# Altium PCB top-board.PcbDoc
Units mil, origin at the board's own origin, x right, y up, seen from the top; angles counter-clockwise.
Board outline 6000 x 6000 mil, 2 copper layers (Top Layer, Bottom Layer); 53 components, 50 nets, 178 pads, 0 vias.
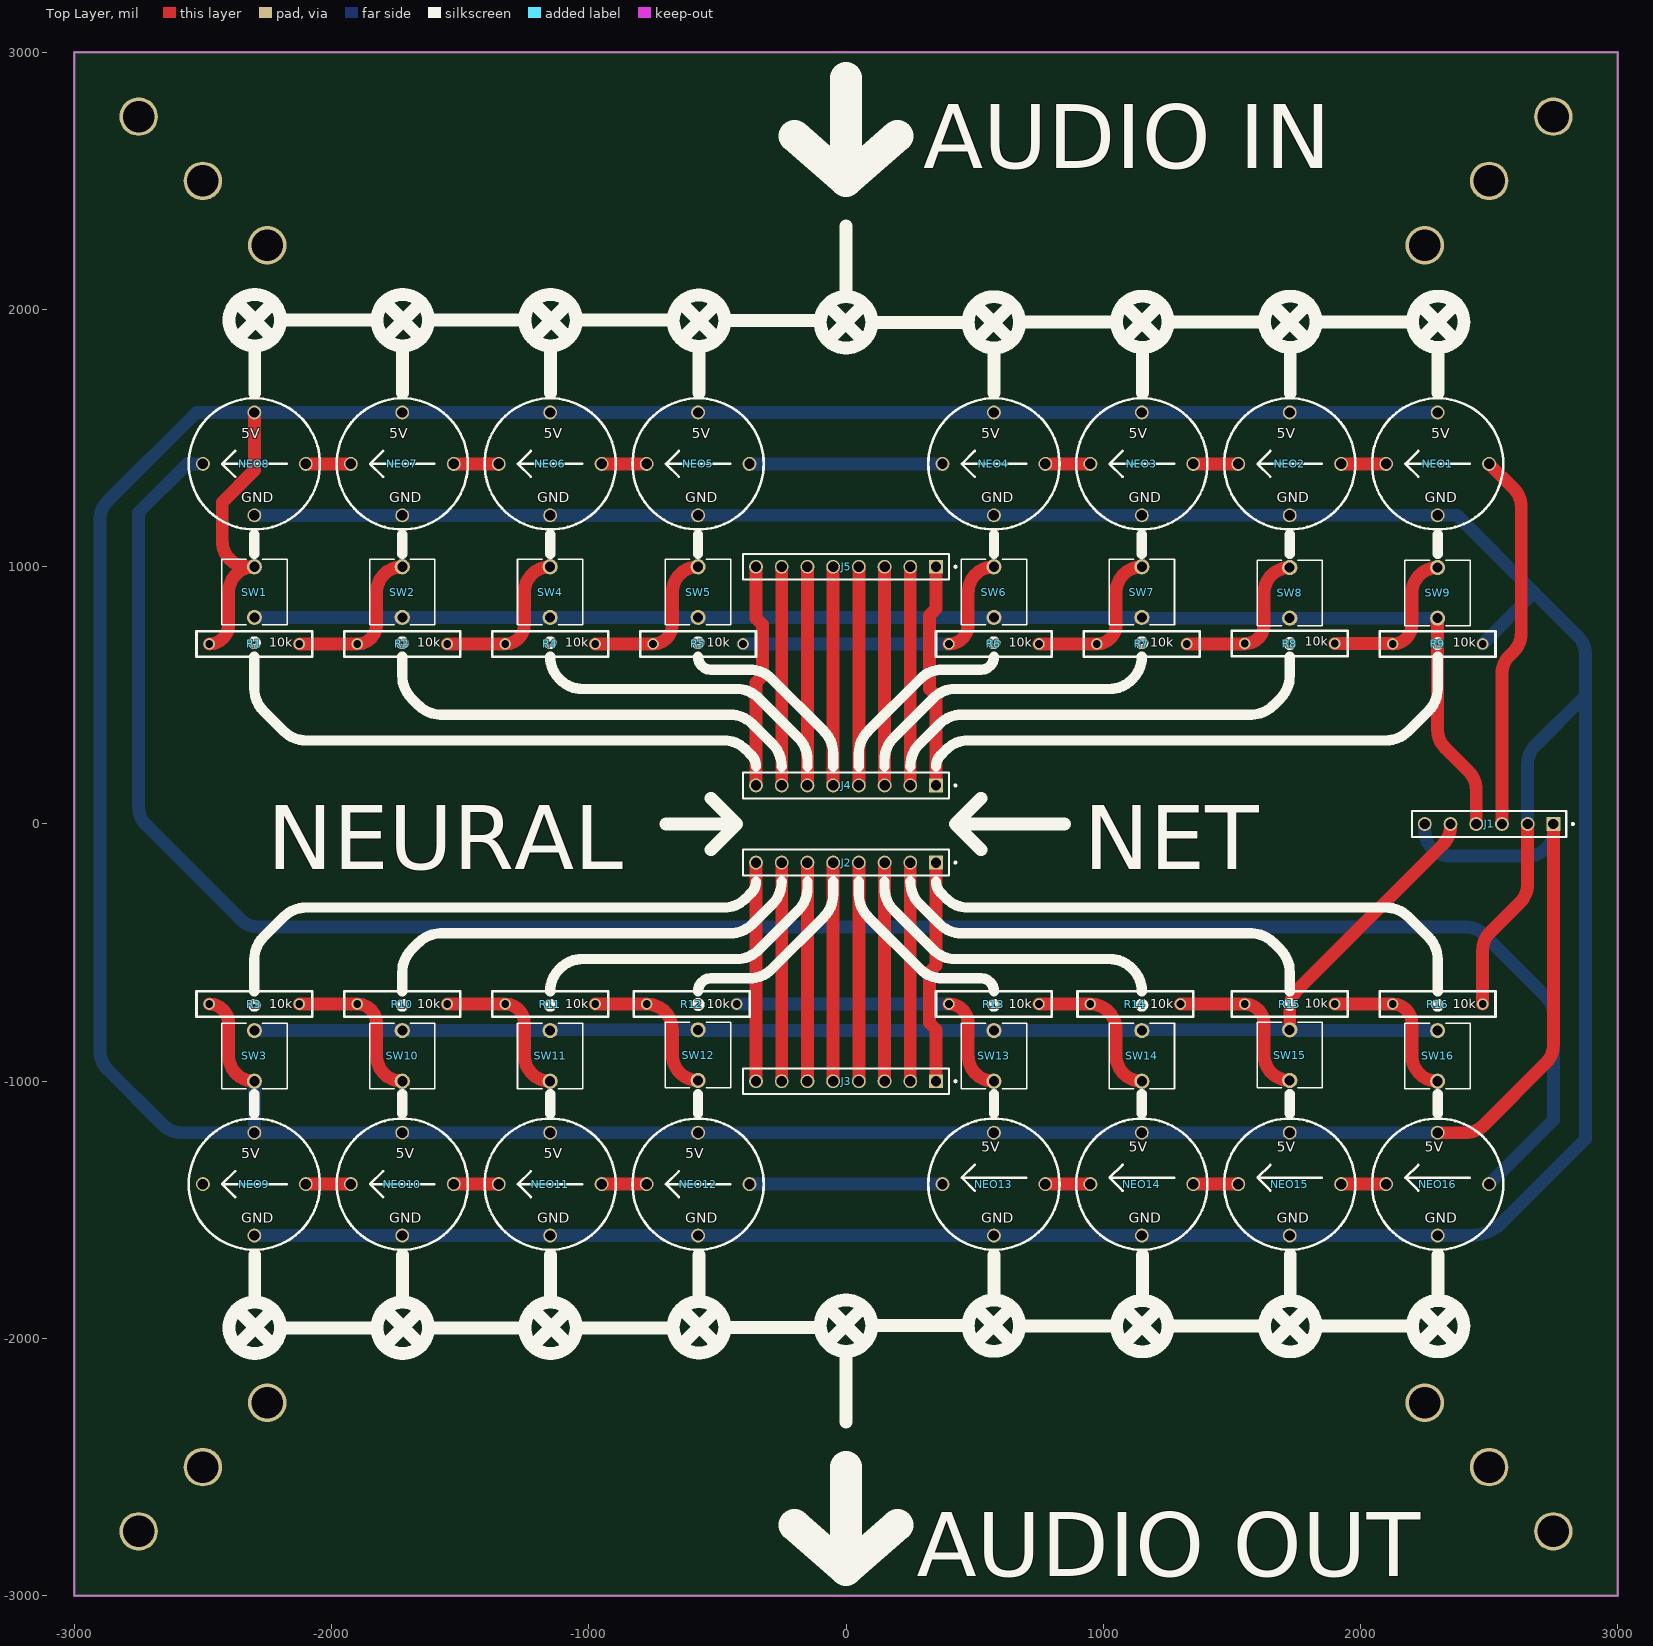
[diagram p0: Top Layer view]
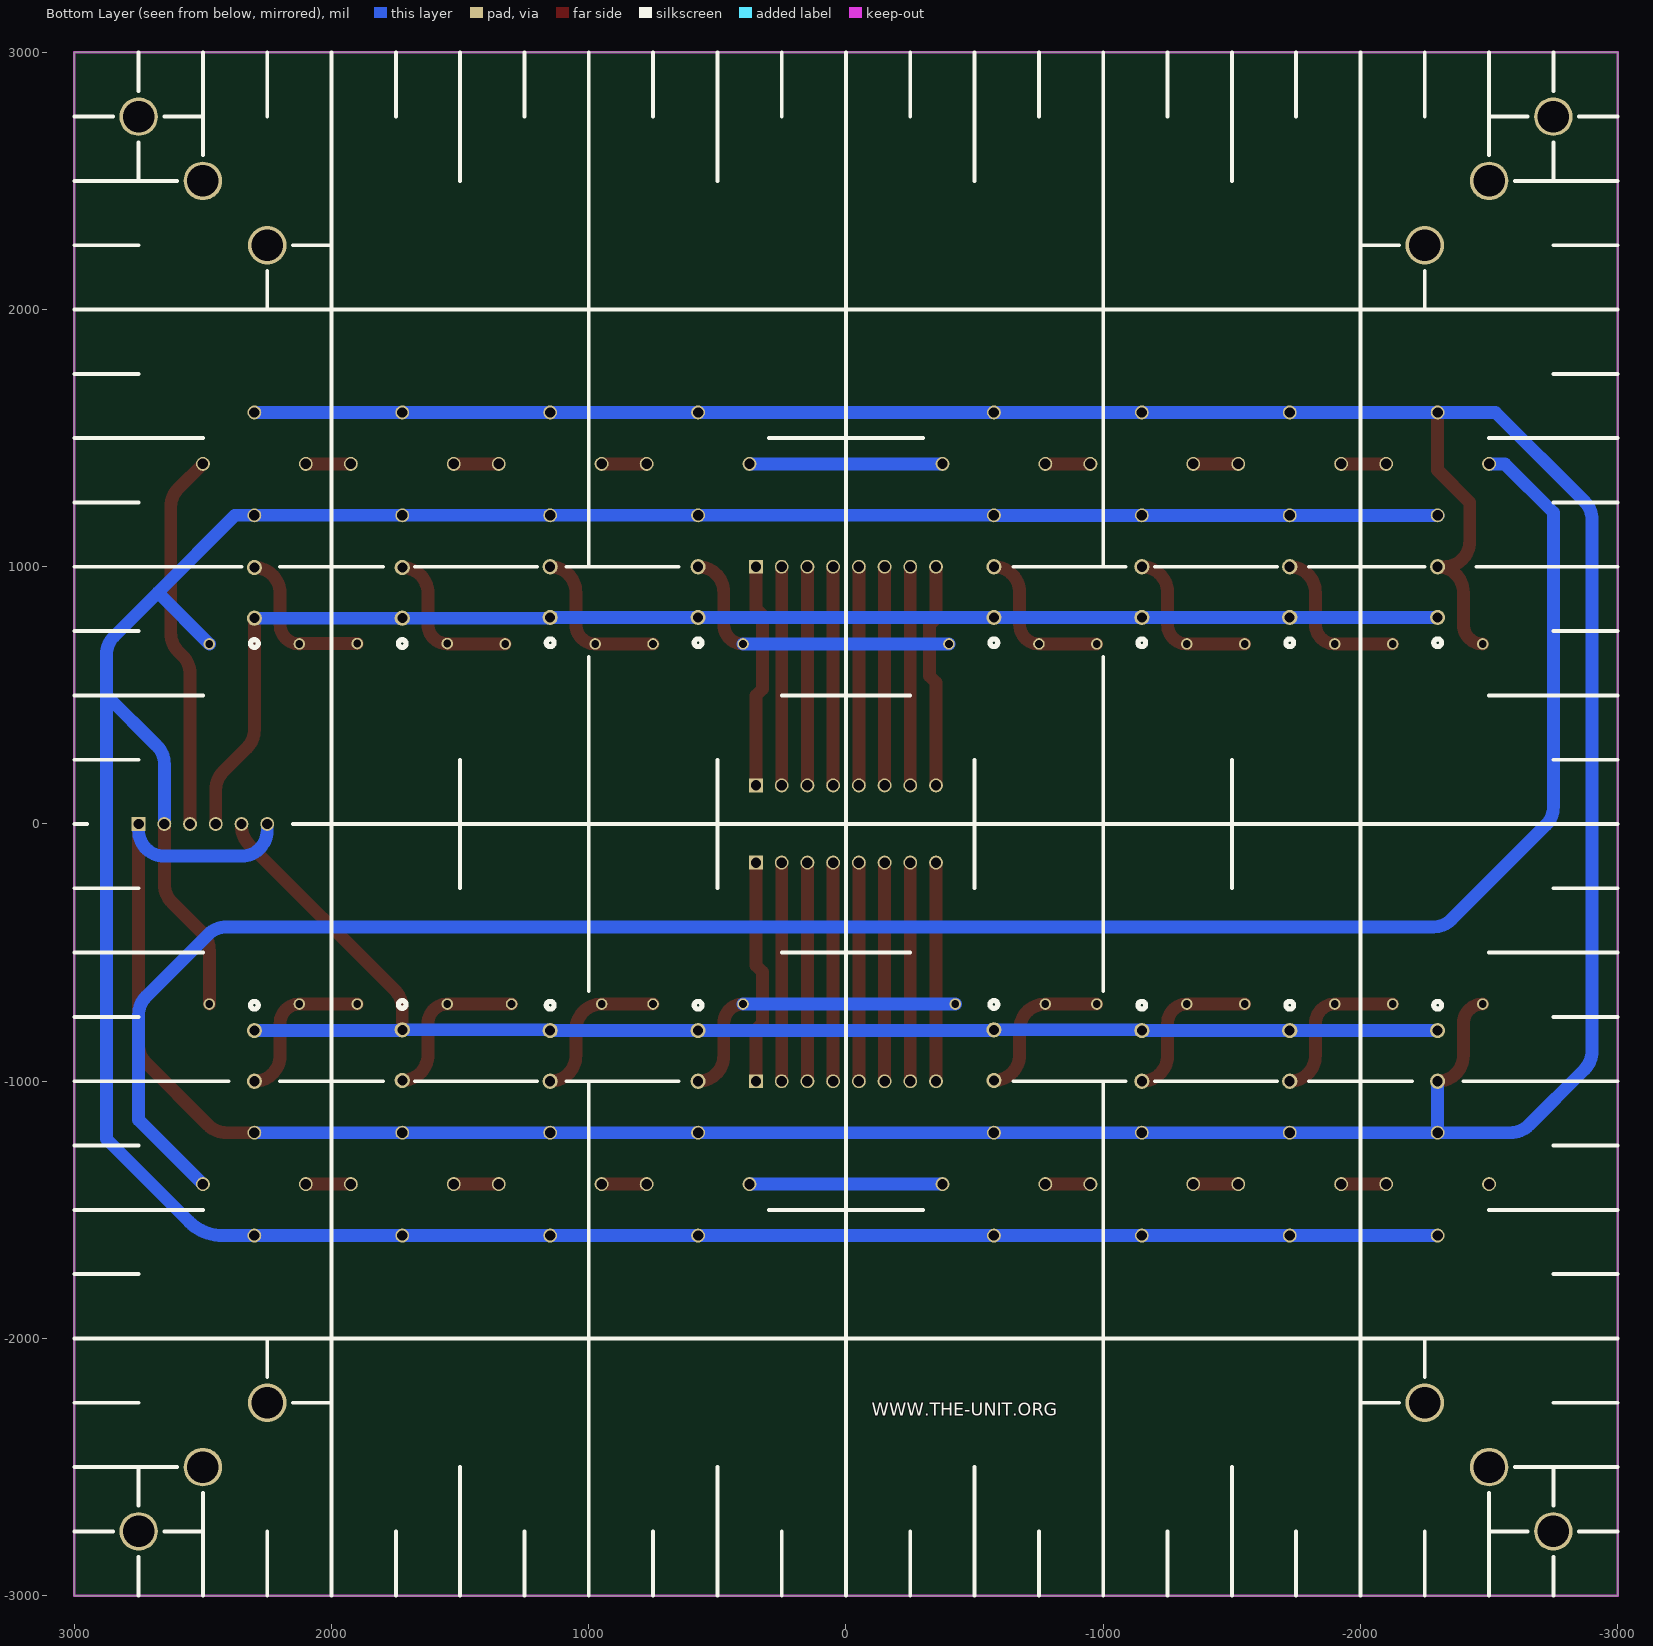
[diagram p1: Bottom Layer view, seen from below]
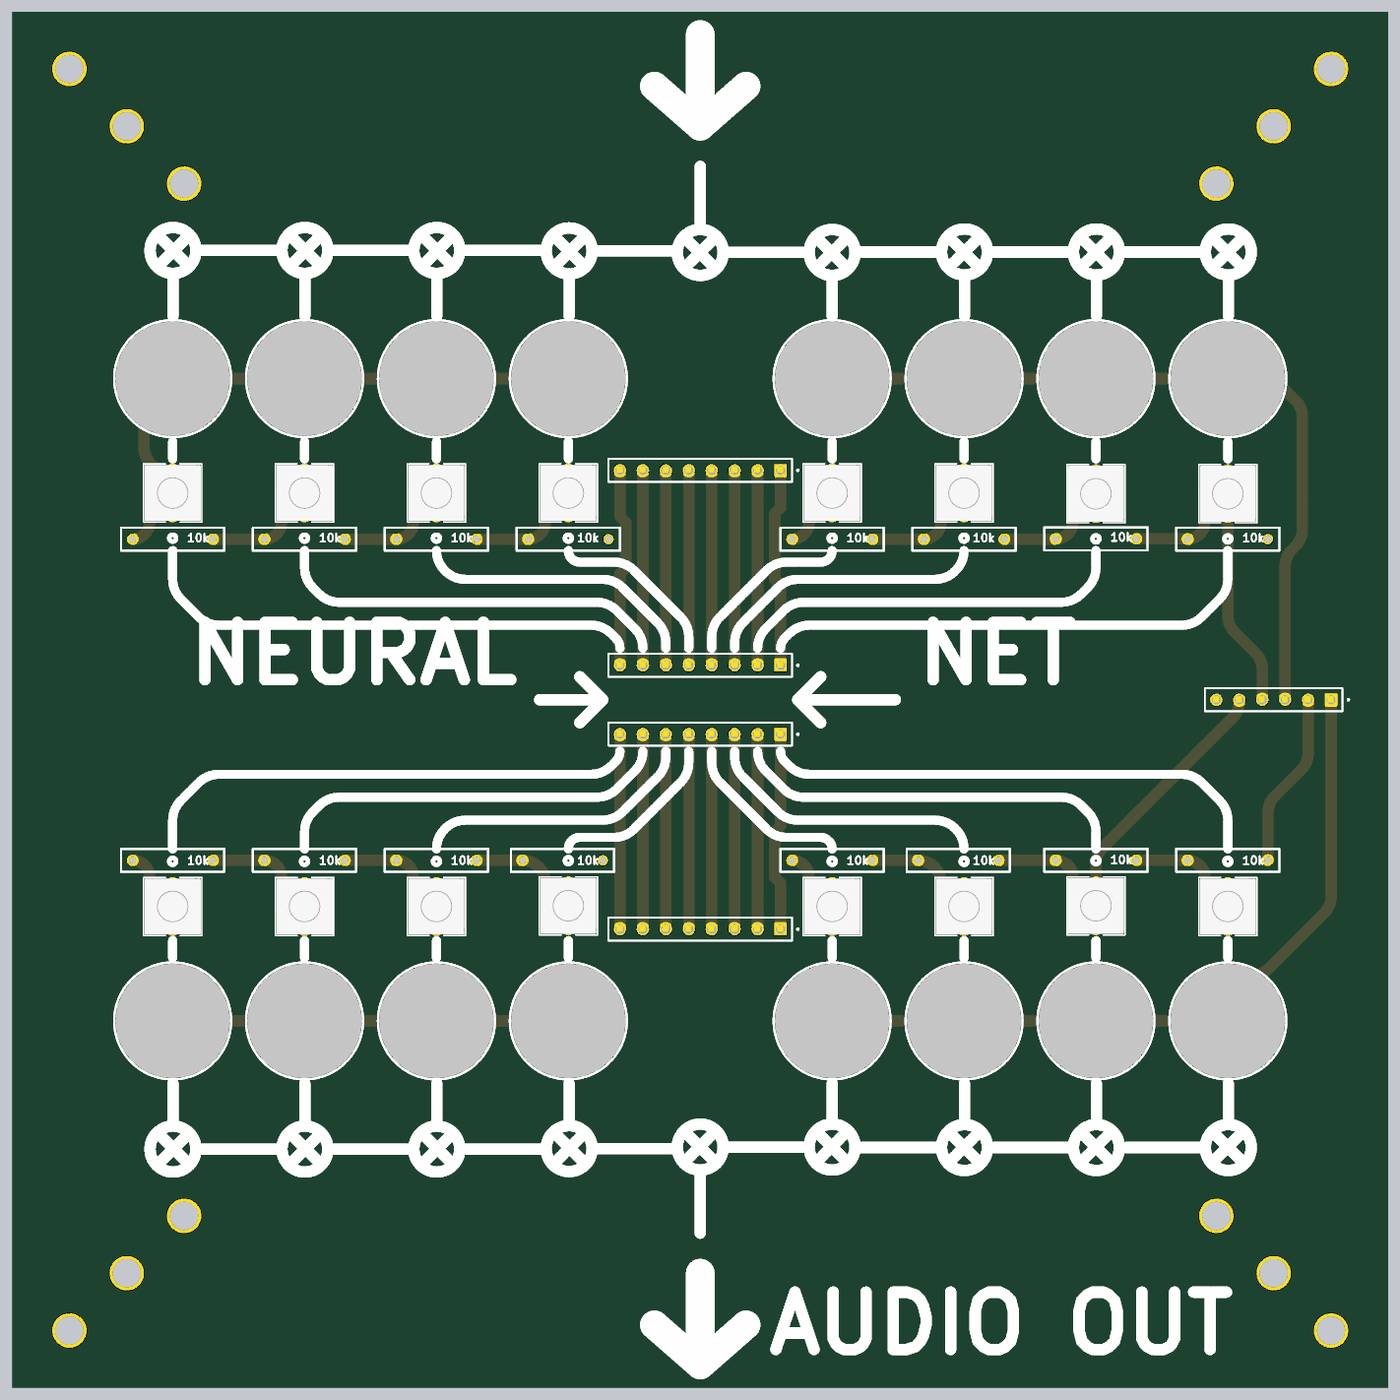
[diagram p2: 3D render of the assembled board from above, using the file's embedded part models]

## Layer stack, top to bottom
Top Solder: solder mask 0.4, Solder Resist, Dk 3.5
Top Layer: signal copper 1.4
Dielectric 1: dielectric 12.6, FR-4, Dk 4.8
Bottom Layer: signal copper 1.4
Bottom Solder: solder mask 0.4, Solder Resist, Dk 3.5

## Board outline
-3000,-3000 3000,-3000 3000,3000 -3000,3000

## Design rules (kind name [scope] priority, off if disabled: settings)
Clearance [All] p1: gap=10 ignorepadtopadclearanceinfootprint=FALSE except(0: Arc-Hole Track-Hole SMDPad-Hole THPad-Hole Via-Hole Fill-Hole Poly-Hole Region-Hole Text-Hole)
PolygonConnect [All] p1: connectstyle=Relief reliefconductorwidth=10 reliefentries=4 polygonreliefangle="90 Angle" airgapwidth=10
RoutingVias [All] p1: holewidth=28 width=50 viastyle="Through Hole" minholewidth=28 minwidth=50 maxholewidth=28 maxwidth=50
SolderMaskExpansion [All] p1: expansion=4 istentingtop=FALSE
Width [All] p1: maxlimit=150 minlimit=10 preferedwidth=50 minimp=50.000000 maximp=50.000000 favimp=50.000000
30 further rules are at their usual default settings.

## Components (designator, comment, footprint, x,y, rotation, side; value= is the part's Value field where it differs from the comment)
J1 "TSW-106-07-G-S" SAMTEC_TSW-106-07-G-S 2500,0 r180 top
J2 "TSW-108-07-G-S" SAMTEC_TSW-108-07-G-S 0,-150 r180 top
J3 "TSW-108-07-G-S" SAMTEC_TSW-108-07-G-S 0,-1000 r180 top
J4 "TSW-108-07-G-S" SAMTEC_TSW-108-07-G-S 0,150 r180 top
J5 "TSW-108-07-G-S" SAMTEC_TSW-108-07-G-S 0,1000 r180 top
NEO1 "adafruit-1559-neopixel-flora" adafruit-1559-neopixel-flora 2300,1400 r0 top
NEO2 "adafruit-1559-neopixel-flora" adafruit-1559-neopixel-flora 1725,1400 r0 top
NEO3 "adafruit-1559-neopixel-flora" adafruit-1559-neopixel-flora 1150,1400 r0 top
NEO4 "adafruit-1559-neopixel-flora" adafruit-1559-neopixel-flora 575,1400 r0 top
NEO5 "adafruit-1559-neopixel-flora" adafruit-1559-neopixel-flora -575,1400 r0 top
NEO6 "adafruit-1559-neopixel-flora" adafruit-1559-neopixel-flora -1150,1400 r0 top
NEO7 "adafruit-1559-neopixel-flora" adafruit-1559-neopixel-flora -1725,1400 r0 top
NEO8 "adafruit-1559-neopixel-flora" adafruit-1559-neopixel-flora -2300,1400 r0 top
NEO9 "adafruit-1559-neopixel-flora" adafruit-1559-neopixel-flora -2300,-1400 r0 top
NEO10 "adafruit-1559-neopixel-flora" adafruit-1559-neopixel-flora -1725,-1400 r0 top
NEO11 "adafruit-1559-neopixel-flora" adafruit-1559-neopixel-flora -1150,-1400 r0 top
NEO12 "adafruit-1559-neopixel-flora" adafruit-1559-neopixel-flora -575,-1400 r0 top
NEO13 "adafruit-1559-neopixel-flora" adafruit-1559-neopixel-flora 575,-1400 r0 top
NEO14 "adafruit-1559-neopixel-flora" adafruit-1559-neopixel-flora 1150,-1400 r0 top
NEO15 "adafruit-1559-neopixel-flora" adafruit-1559-neopixel-flora 1725,-1400 r0 top
NEO16 "adafruit-1559-neopixel-flora" adafruit-1559-neopixel-flora 2300,-1400 r0 top
R1 "Resistor" "thruhole resistor" -2300,700 r180 top
R2 "Resistor" "thruhole resistor" -1725,700 r180 top
R3 "Resistor" "thruhole resistor" -2300,-700 r180 top
R4 "Resistor" "thruhole resistor" -1150,700 r180 top
R5 "Resistor" "thruhole resistor" -575,700 r180 top
R6 "Resistor" "thruhole resistor" 575,700 r180 top
R7 "Resistor" "thruhole resistor" 1150,700 r180 top
R8 "Resistor" "thruhole resistor" 1725,701.43 r180 top
R9 "Resistor" "thruhole resistor" 2300,700 r180 top
R10 "Resistor" "thruhole resistor" -1725,-700 r180 top
R11 "Resistor" "thruhole resistor" -1150,-700 r180 top
R12 "Resistor" "thruhole resistor" -600,-700 r180 top
R13 "Resistor" "thruhole resistor" 575,-700 r180 top
R14 "Resistor" "thruhole resistor" 1125,-700 r180 top
R15 "Resistor" "thruhole resistor" 1725,-700 r180 top
R16 "Resistor" "thruhole resistor" 2300,-700 r180 top
SW1 "TL59AF100Q" SW_TL59AF100Q_EWI -2300,803.15 r90 top
SW2 "TL59AF100Q" SW_TL59AF100Q_EWI -1725,803.15 r90 top
SW3 "TL59AF100Q" SW_TL59AF100Q_EWI -2300,-803.15 r270 top
SW4 "TL59AF100Q" SW_TL59AF100Q_EWI -1150,803.15 r90 top
SW5 "TL59AF100Q" SW_TL59AF100Q_EWI -575,803.15 r90 top
SW6 "TL59AF100Q" SW_TL59AF100Q_EWI 575,803.15 r90 top
SW7 "TL59AF100Q" SW_TL59AF100Q_EWI 1150,803.15 r90 top
SW8 "TL59AF100Q" SW_TL59AF100Q_EWI 1725,800 r90 top
SW9 "TL59AF100Q" SW_TL59AF100Q_EWI 2300,800 r90 top
SW10 "TL59AF100Q" SW_TL59AF100Q_EWI -1725,-803.15 r270 top
SW11 "TL59AF100Q" SW_TL59AF100Q_EWI -1150,-803.15 r270 top
SW12 "TL59AF100Q" SW_TL59AF100Q_EWI -575,-800 r270 top
SW13 "TL59AF100Q" SW_TL59AF100Q_EWI 575,-803.15 r270 top
SW14 "TL59AF100Q" SW_TL59AF100Q_EWI 1150,-803.15 r270 top
SW15 "TL59AF100Q" SW_TL59AF100Q_EWI 1725,-800 r270 top
SW16 "TL59AF100Q" SW_TL59AF100Q_EWI 2300,-803.15 r270 top

## Footprints (in the part's own frame and the unit in brackets; to place one, negate y for a bottom-side part, rotate by r counter-clockwise, add the part's x,y. Pads: shape width x height; smd on the part's side, far side on the other; paste and mask are expansions set on the pad)
adafruit-1559-neopixel-flora [mm]
  round 1.37 hole 1.02: 5V(0,5.08) GND(0,-5.08) IN(5.08,0) OUT(-5.08,0)
  silkscreen extent -6.48,-6.48 6.48,6.48, body extent -6.35,-6.35 6.35,6.35, height 2.4
SAMTEC_TSW-106-07-G-S [mm]
  rect 1.37x1.37 hole 1.02: 01(-6.35,0)
  round 1.37 hole 1.02: 02(-3.81,0) 03(-1.27,0) 04(1.27,0) 05(3.81,0) 06(6.35,0)
  silkscreen extent -8.37,-1.27 7.62,1.27, body extent -7.68,-1.32 7.68,1.22, height 1.34
SAMTEC_TSW-108-07-G-S [mm]
  rect 1.37x1.37 / inner round 1.37 / far side rect 1.37x1.37 hole 1.02: 01(-8.89,0)
  round 1.37 hole 1.02: 02(-6.35,0) 03(-3.81,0) 04(-1.27,0) 05(1.27,0) 06(3.81,0) 07(6.35,0) 08(8.89,0)
  silkscreen extent -10.91,-1.27 10.16,1.27, body extent -10.25,-1.34 10.2,1.2, height 1.34
SW_TL59AF100Q_EWI [mil]
  round 59 / inner round 60 / far side round 59 hole 39 paste-99999 mask+0: 1(0,0) 2(196.85,0)
  silkscreen extent -114,-127 225,127, body extent -24,-122 220,122, height 202
"thruhole resistor" [mil] "thruhole resistor"
  round 45 hole 30: 1(-175,0) 2(175,0)
  silkscreen extent -225,-50 225,50

## Part data
J1: Package=None, Availability=Unavailable, MF="Samtec Inc.", MP=TSW-106-07-G-S, Price=None
J2 J3 J4 J5: "TSW - Samtec 2.54mm Pin Header 10.92mm Overall Pin Length (07) - Fast Stock", Package=None, Check_prices=https://www.snapeda.com/parts/TSW-108-07-G-S/Samtec+Inc./view-part/?ref=eda, MF="Samtec Inc.", MP=TSW-108-07-G-S, SnapEDA_Link=https://www.snapeda.com/parts/TSW-108-07-G-S/Samtec+Inc./view-part/?ref=snap
SW1 SW2 SW3 SW4 SW5 SW6 SW7 SW8 SW9 SW10 SW11 SW12 SW13 SW14 SW15 SW16: "No Description Available", Mfr_Name=E-Switch, Copyright="Copyright (C) 2024 Ultra Librarian. All rights reserved.", Manufacturer_Part_Number=TL59AF100Q, RefDes=RefDes, Type=DEV

## Free pads (board coordinates)
  round 150 hole 123 unplated: 8(-2750,-2750) 8(-2750,2750) 8(-2500,-2500) 8(-2500,2500) 8(-2250,-2250) 8(-2250,2250) 8(2250,-2250) 8(2250,2250) 8(2500,-2500) 8(2500,2500) 8(2750,-2750) 8(2750,2750)

## Nets (pads, with @x,y where several pads share a name; then routed paths per layer and width w, separated by ;. In a path a pad name is that pad's centre, name@x,y a point inside that pad or via, vN(x,y) a via of type N, cw(c..) or ccw(c..) an arc to the next point about the centre after c; other vN are vias at no path point)
GND: J1.02 NEO1.GND NEO2.GND NEO3.GND NEO4.GND NEO5.GND NEO6.GND NEO7.GND NEO8.GND NEO9.GND NEO10.GND NEO11.GND NEO12.GND NEO13.GND NEO14.GND NEO15.GND NEO16.GND R9.1 R16.1 | length 14261.8
  Top Layer w50: R16.1 2475,-491.42 cw(c2575,-491.42) 2504.29,-420.71 2620.71,-304.29 ccw(c2550,-233.58) 2650,-233.58 J1.02
  Bottom Layer w50: NEO8.GND@-2300.75,1199.25 -575.75,1199.25 NEO5.GND NEO4.GND NEO3.GND NEO2.GND NEO1.GND 2375,1200 2675,900 ; NEO9.GND NEO10.GND NEO11.GND NEO12.GND NEO13.GND NEO14.GND NEO15.GND NEO16.GND 2423.22,-1600 ccw(c2423.22,-1414.64) 2554.29,-1545.71 2875,-1225 2875,500 ; R9.1 2675,900 ; J1.02 2650,233.58 cw(c2750,233.58) 2679.29,304.29 2875,500 ; 2675,900 2845.71,729.29 cw(c2775,658.58) 2875,658.58 2875,500
NetJ1_01: J1.01 J1.06 NEO1.5V NEO2.5V NEO3.5V NEO4.5V NEO5.5V NEO6.5V NEO7.5V NEO8.5V NEO9.5V NEO10.5V NEO11.5V NEO12.5V NEO13.5V NEO14.5V NEO15.5V NEO16.5V R1.2 R3.2 SW1.2 SW3.2 | length 16663.4
  Top Layer w50: R3.2 cw(c-2475,-775) -2400,-775 -2400,-900 ccw(c-2300,-900) SW3.2 ; R1.2 ccw(c-2475,775) -2400,775 -2400,900 cw(c-2300,900) SW1.2 -2325,1000 cw(c-2325,1100) -2425,1100 -2425,1250 -2300,1375 NEO8.5V NEO8.5V@-2300,1601.82 ; NEO16.5V 2408.58,-1200 ccw(c2408.58,-1100) 2479.29,-1170.71 2720.71,-929.29 ccw(c2650,-858.58) 2750,-858.58 J1.01
  Bottom Layer w50: -2900,-866.79 -2900,1183.58 cw(c-2800,1183.58) -2870.71,1254.29 -2525,1600 NEO8.5V NEO7.5V NEO6.5V NEO5.5V NEO4.5V NEO3.5V NEO2.5V NEO1.5V ; -2900,-850 -2900,-883.58 ccw(c-2800,-883.58) -2870.71,-954.29 -2654.29,-1170.71 ccw(c-2583.58,-1100) -2583.58,-1200 -2398.22,-1200 NEO9.5V NEO10.5V NEO11.5V NEO12.5V NEO13.5V NEO14.5V NEO15.5V NEO16.5V ; NEO9.5V@-2300,-1175 SW3.2 ; J1.06 2250,-25 ccw(c2350,-25) 2350,-125 2650,-125 ccw(c2650,-25) 2750,-25 J1.01
NetJ1_03: J1.03 NEO1.IN | length 1469.9
  Top Layer w50: NEO1.IN 2595.71,1304.29 cw(c2525,1233.58) 2625,1233.58 2625,741.42 cw(c2525,741.42) 2595.71,670.71 2579.29,654.29 ccw(c2650,583.58) 2550,583.58 J1.03
NetJ1_04: J1.04 SW1.1 SW2.1 SW4.1 SW5.1 SW6.1 SW7.1 SW8.1 SW9.1 | length 5455.3
  Top Layer w50: SW9.1 2300,366.42 ccw(c2400,366.42) 2329.29,295.71 2420.71,204.29 cw(c2350,133.58) 2450,133.58 J1.04
  Bottom Layer w50: SW1.1 SW2.1 SW4.1 SW5.1 SW6.1 SW7.1 ccw(c1153.15,803.15) 1153.15,800 SW8.1 SW9.1
NetJ1_05: J1.05 SW3.1 SW10.1 SW11.1 SW12.1 SW13.1 SW14.1 SW15.1 SW16.1 | length 5657.5
  Top Layer w50: SW15.1 1725,-716.42 cw(c1825,-716.42) 1754.29,-645.71 2320.71,-79.29 ccw(c2250,-8.58) 2350,-8.58 J1.05
  Bottom Layer w50: SW3.1 SW10.1 SW11.1 cw(c-1146.85,-803.15) -1146.85,-800 SW12.1 ccw(c-571.85,-800) -571.85,-803.15 SW13.1 SW14.1 cw(c1153.15,-803.15) 1153.15,-800 SW15.1 ccw(c1728.15,-800) 1728.15,-803.15 SW16.1
NetJ2_01: J2.01 J3.01 | length 870.7
  Top Layer w50: J3.01 350,-799.02 325,-774.02 325,-575 350,-550 J2.01
NetJ2_02: J2.02 J3.02 | length 850
  Top Layer w50: J3.02 J2.02
NetJ2_03: J2.03 J3.03 | length 850
  Top Layer w50: J3.03 J2.03
NetJ2_04: J2.04 J3.04 | length 850
  Top Layer w50: J3.04 J2.04
NetJ2_05: J2.05 J3.05 | length 850
  Top Layer w50: J3.05 J2.05
NetJ2_06: J2.06 J3.06 | length 850
  Top Layer w50: J3.06 J2.06
NetJ2_07: J2.07 J3.07 | length 850
  Top Layer w50: J3.07 J2.07
NetJ2_08: J2.08 J3.08 | length 850
  Top Layer w50: J3.08 J2.08
NetJ4_01: J4.01 J5.01 | length 870.7
  Top Layer w50: J4.01 350,500 325,525 325,811.52 350,836.52 J5.01
NetJ4_02: J4.02 J5.02 | length 850
  Top Layer w50: J4.02 J5.02
NetJ4_03: J4.03 J5.03 | length 850
  Top Layer w50: J4.03 J5.03
NetJ4_04: J4.04 J5.04 | length 850
  Top Layer w50: J4.04 J5.04
NetJ4_05: J4.05 J5.05 | length 850
  Top Layer w50: J4.05 J5.05
NetJ4_06: J4.06 J5.06 | length 850
  Top Layer w50: J4.06 J5.06
NetJ4_07: J4.07 J5.07 | length 850
  Top Layer w50: J4.07 J5.07
NetJ4_08: J4.08 J5.08 | length 870.7
  Top Layer w50: J4.08 -350,550 -325,575 -325,774.47 -350,799.47 J5.08
NetNEO1_OUT: NEO1.OUT NEO2.IN | length 175
  Top Layer w50: NEO2.IN NEO1.OUT
NetNEO2_OUT: NEO2.OUT NEO3.IN | length 175
  Top Layer w50: NEO3.IN NEO2.OUT
NetNEO3_OUT: NEO3.OUT NEO4.IN | length 175
  Top Layer w50: NEO4.IN NEO3.OUT
NetNEO4_OUT: NEO4.OUT NEO5.IN | length 750
  Bottom Layer w50: NEO5.IN NEO4.OUT
NetNEO5_OUT: NEO5.OUT NEO6.IN | length 175
  Top Layer w50: NEO6.IN NEO5.OUT
NetNEO6_OUT: NEO6.OUT NEO7.IN | length 175
  Top Layer w50: NEO7.IN NEO6.OUT
NetNEO7_OUT: NEO7.OUT NEO8.IN | length 175
  Top Layer w50: NEO8.IN NEO7.OUT
NetNEO8_OUT: NEO8.OUT NEO16.IN | length 8099.2
  Bottom Layer w50: NEO8.OUT -2561.23,1400 -2750,1211.23 -2750,66.42 ccw(c-2650,66.42) -2720.71,-4.29 -2354.29,-370.71 ccw(c-2283.58,-300) -2283.58,-400 2408.58,-400 cw(c2408.58,-500) 2479.29,-429.29 2720.71,-670.71 cw(c2650,-741.42) 2750,-741.42 2750,-1150 NEO16.IN@2501.29,-1398.71
NetNEO9_IN: NEO9.IN NEO10.OUT | length 175
  Top Layer w50: NEO9.IN NEO10.OUT
NetNEO10_IN: NEO10.IN NEO11.OUT | length 175
  Top Layer w50: NEO10.IN NEO11.OUT
NetNEO11_IN: NEO11.IN NEO12.OUT | length 175
  Top Layer w50: NEO11.IN NEO12.OUT
NetNEO12_IN: NEO12.IN NEO13.OUT | length 750
  Bottom Layer w50: NEO12.IN NEO13.OUT
NetNEO13_IN: NEO13.IN NEO14.OUT | length 175
  Top Layer w50: NEO13.IN NEO14.OUT
NetNEO14_IN: NEO14.IN NEO15.OUT | length 175
  Top Layer w50: NEO14.IN NEO15.OUT
NetNEO15_IN: NEO15.IN NEO16.OUT | length 175
  Top Layer w50: NEO15.IN NEO16.OUT
NetR1_1: R1.1 R2.2 SW2.2 | length 624.9
  Top Layer w50: R1.1 R2.2 ccw(c-1900,775) -1825,775 -1825,900 cw(c-1725,900) SW2.2
NetR2_1: R2.1 R4.2 SW4.2 | length 624.9
  Top Layer w50: R2.1 R4.2 ccw(c-1325,775) -1250,775 -1250,900 cw(c-1150,900) SW4.2
NetR3_1: R3.1 R10.2 SW10.2 | length 624.9
  Top Layer w50: R3.1 R10.2 cw(c-1900,-775) -1825,-775 -1825,-900 ccw(c-1725,-900) SW10.2
NetR4_1: R4.1 R5.2 SW5.2 | length 624.9
  Top Layer w50: R4.1 R5.2 ccw(c-750,775) -675,775 -675,900 cw(c-575,900) SW5.2
NetR5_1: R5.1 R6.2 SW6.2 | length 1199.9
  Top Layer w50: R6.2 ccw(c400,775) 475,775 475,900 cw(c575,900) SW6.2
  Bottom Layer w50: R5.1 R6.2
NetR6_1: R6.1 R7.2 SW7.2 | length 624.9
  Top Layer w50: R6.1 R7.2 ccw(c975,775) 1050,775 1050,900 cw(c1150,900) SW7.2
NetR7_1: R7.1 R8.2 SW8.2 | length 621.7
  Top Layer w50: R7.1 1548.57,700 ccw(c1548.57,701.43) R8.2 1551.43,701.43 ccw(c1551.43,775) 1625,775 1625,896.85 cw(c1725,896.85) SW8.2
NetR8_1: R8.1 R9.2 SW9.2 | length 622.1
  Top Layer w50: R8.1 2121.56,701.43 cw(c2121.56,696.56) R9.2 ccw(c2125,775) 2200,775 2200,896.85 cw(c2300,896.85) SW9.2
NetR10_1: R10.1 R11.2 SW11.2 | length 624.9
  Top Layer w50: R10.1 R11.2 cw(c-1325,-775) -1250,-775 -1250,-900 ccw(c-1150,-900) SW11.2
NetR11_1: R11.1 R12.2 SW12.2 | length 611
  Top Layer w50: R11.1 R12.2 cw(c-775,-800) -675,-800 -675,-896.85 ccw(c-575,-896.85) SW12.2
NetR12_1: R12.1 R13.2 SW13.2 | length 1224.9
  Top Layer w50: R13.2 cw(c400,-775) 475,-775 475,-900 ccw(c575,-900) SW13.2
  Bottom Layer w50: R12.1 R13.2
NetR13_1: R13.1 R14.2 SW14.2 | length 614.2
  Top Layer w50: R13.1 R14.2 cw(c950,-800) 1050,-800 1050,-900 ccw(c1150,-900) SW14.2
NetR14_1: R14.1 R15.2 SW15.2 | length 646.7
  Top Layer w50: R14.1 R15.2 cw(c1550,-775) 1625,-775 1625,-896.85 ccw(c1725,-896.85) SW15.2
NetR15_1: R15.1 R16.2 SW16.2 | length 624.9
  Top Layer w50: R15.1 R16.2 cw(c2125,-775) 2200,-775 2200,-900 ccw(c2300,-900) SW16.2
pads on no net: NEO9.OUT

## Keep-outs
Keep-Out Layer:
  lines w10: -3000,-3000 -3000,3000 3000,3000 3000,580 3000,-1070 3000,-3000 -3000,-3000

## Silkscreen, mask and mechanical layers (free items; w line width, h text height)
Top Overlay:
  drawing of 288 lines, arcs and shapes, not listed
  text "AUDIO IN" at 300,2550 h250
  text "5V" at -2350,1500 h39.37
  text "5V" at -1775,1500 h39.37
  text "5V" at -1175,1500 h39.37
  text "5V" at -600,1500 h39.37
  text "5V" at 525,1500 h39.37
  text "5V" at 1100,1500 h39.37
  text "5V" at 1675,1500 h39.37
  text "5V" at 2275,1500 h39.37
  text "GND" at -2350,1250 h39.37
  text "GND" at -1775,1250 h39.37
  text "GND" at -1200,1250 h39.37
  text "GND" at -625,1250 h39.37
  text "GND" at 525,1250 h39.37
  text "GND" at 1100,1250 h39.37
  text "GND" at 1675,1250 h39.37
  text "GND" at 2250,1250 h39.37
  text "10k" at 1783,692.15 h35
  text "10k" at -2242,689 h35
  text "10k" at -1667,689 h35
  text "10k" at -1092,689 h35
  text "10k" at -542,689 h35
  text "10k" at 633,689 h35
  text "10k" at 1183,689 h35
  text "10k" at 2358,689 h35
  text "NEURAL" at -2250,-175 h250
  text "NET" at 925,-175 h250
  text "10k" at 1783,-713.85 h35
  text "10k" at -2242,-717 h35
  text "10k" at -1667,-717 h35
  text "10k" at -1092,-717 h35
  text "10k" at -542,-717 h35
  text "10k" at 633,-717 h35
  text "10k" at 1183,-717 h35
  text "10k" at 2358,-717 h35
  text "5V" at 525,-1275 h39.37
  text "5V" at 1100,-1275 h39.37
  text "5V" at 1675,-1275 h39.37
  text "5V" at 2250,-1275 h39.37
  text "5V" at -2350,-1300 h39.37
  text "5V" at -1750,-1300 h39.37
  text "5V" at -1175,-1300 h39.37
  text "5V" at -625,-1300 h39.37
  text "GND" at -2350,-1550 h39.37
  text "GND" at -1775,-1550 h39.37
  text "GND" at -1200,-1550 h39.37
  text "GND" at -625,-1550 h39.37
  text "GND" at 525,-1550 h39.37
  text "GND" at 1100,-1550 h39.37
  text "GND" at 1675,-1550 h39.37
  text "GND" at 2250,-1550 h39.37
  text "AUDIO OUT" at 275,-2925 h250
Bottom Overlay:
  drawing of 171 lines, arcs and shapes, not listed
  text "WWW.THE-UNIT.ORG" at -100,-2300 h50